# Altium PCB PCB1.PcbDoc
Units mm, origin at the board's own origin, x right, y up, seen from the top; angles counter-clockwise.
Board outline 56.39 x 66.29 mm, 2 copper layers (Top Layer, Bottom Layer); 8 components, 6 nets, 50 pads, 0 vias.
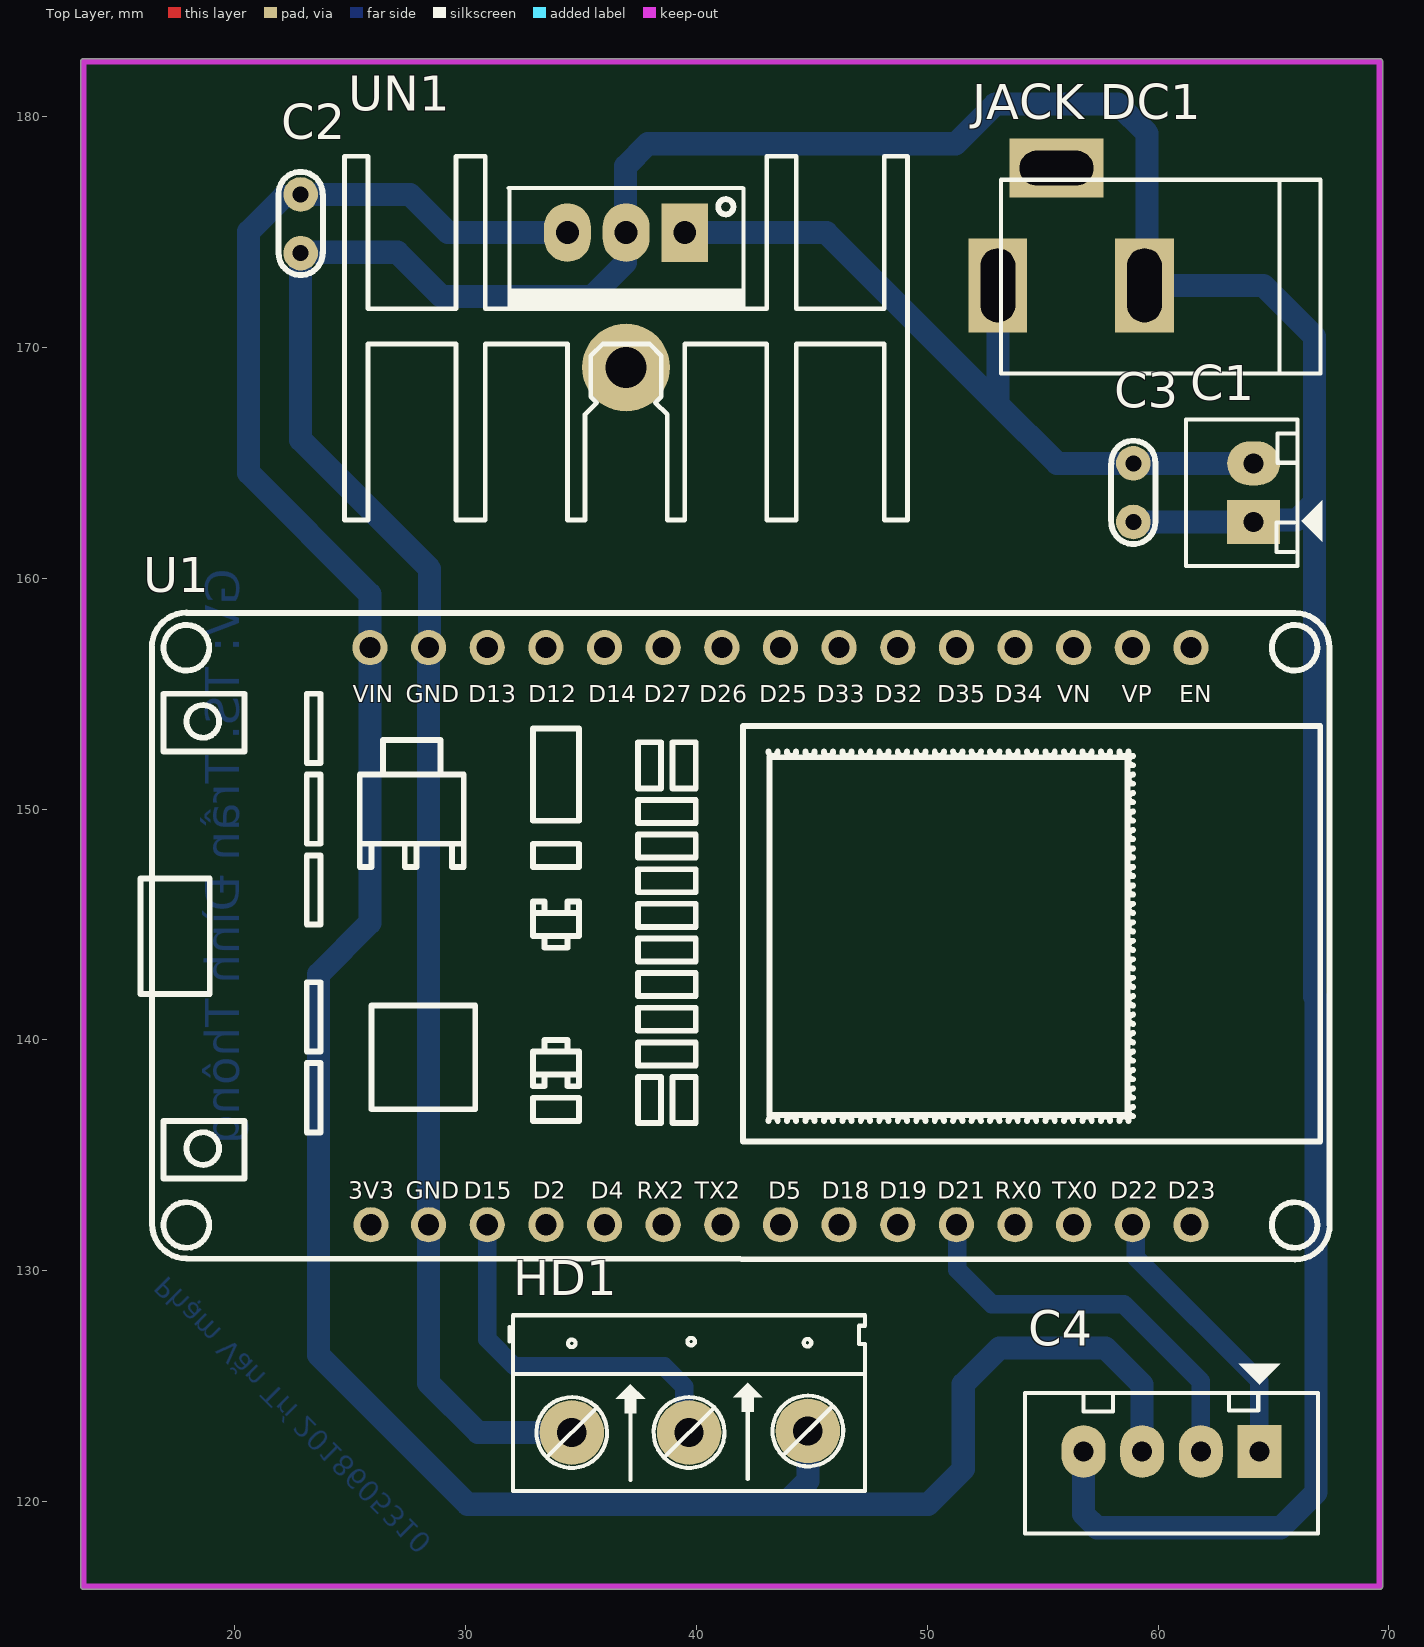
[diagram p0: Top Layer view]
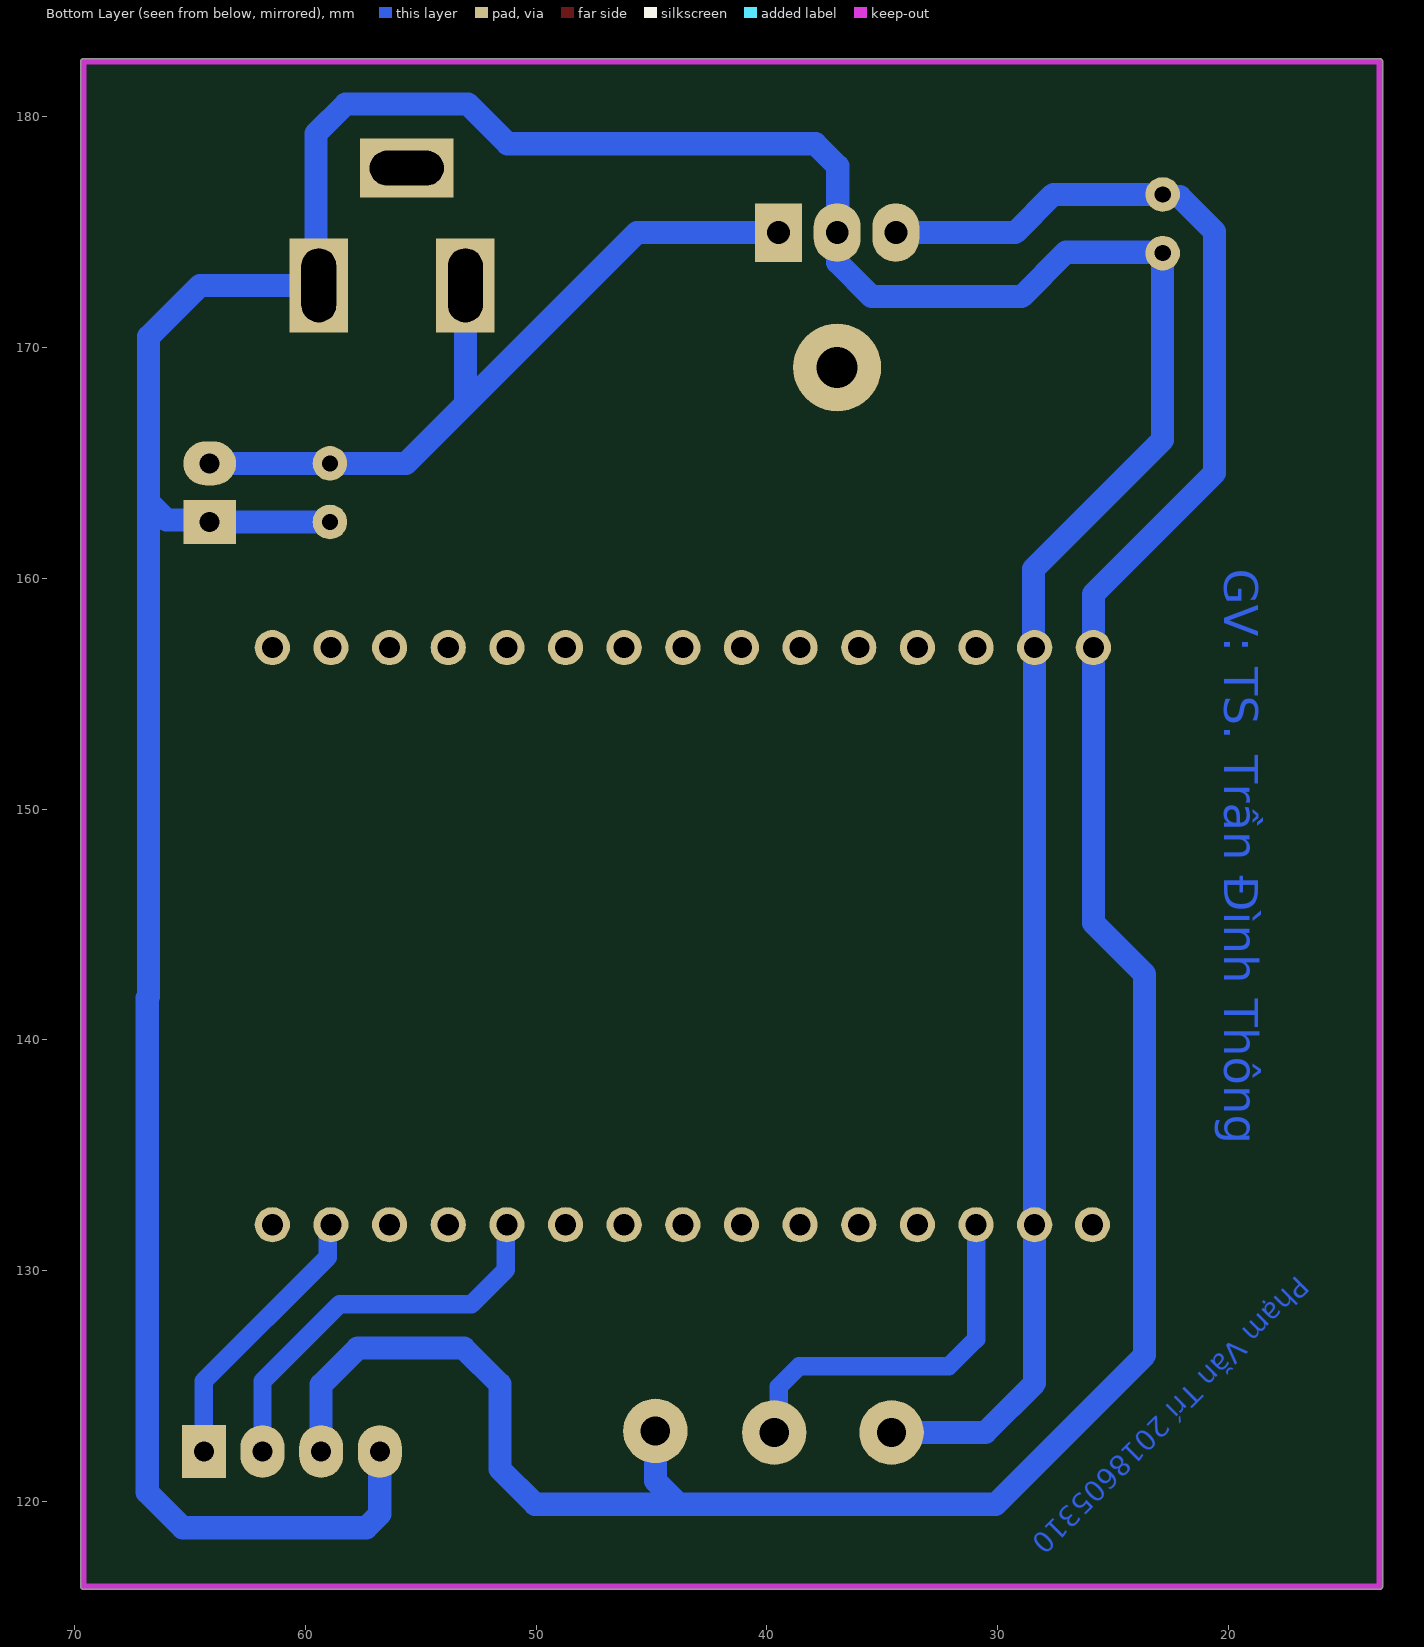
[diagram p1: Bottom Layer view, seen from below]
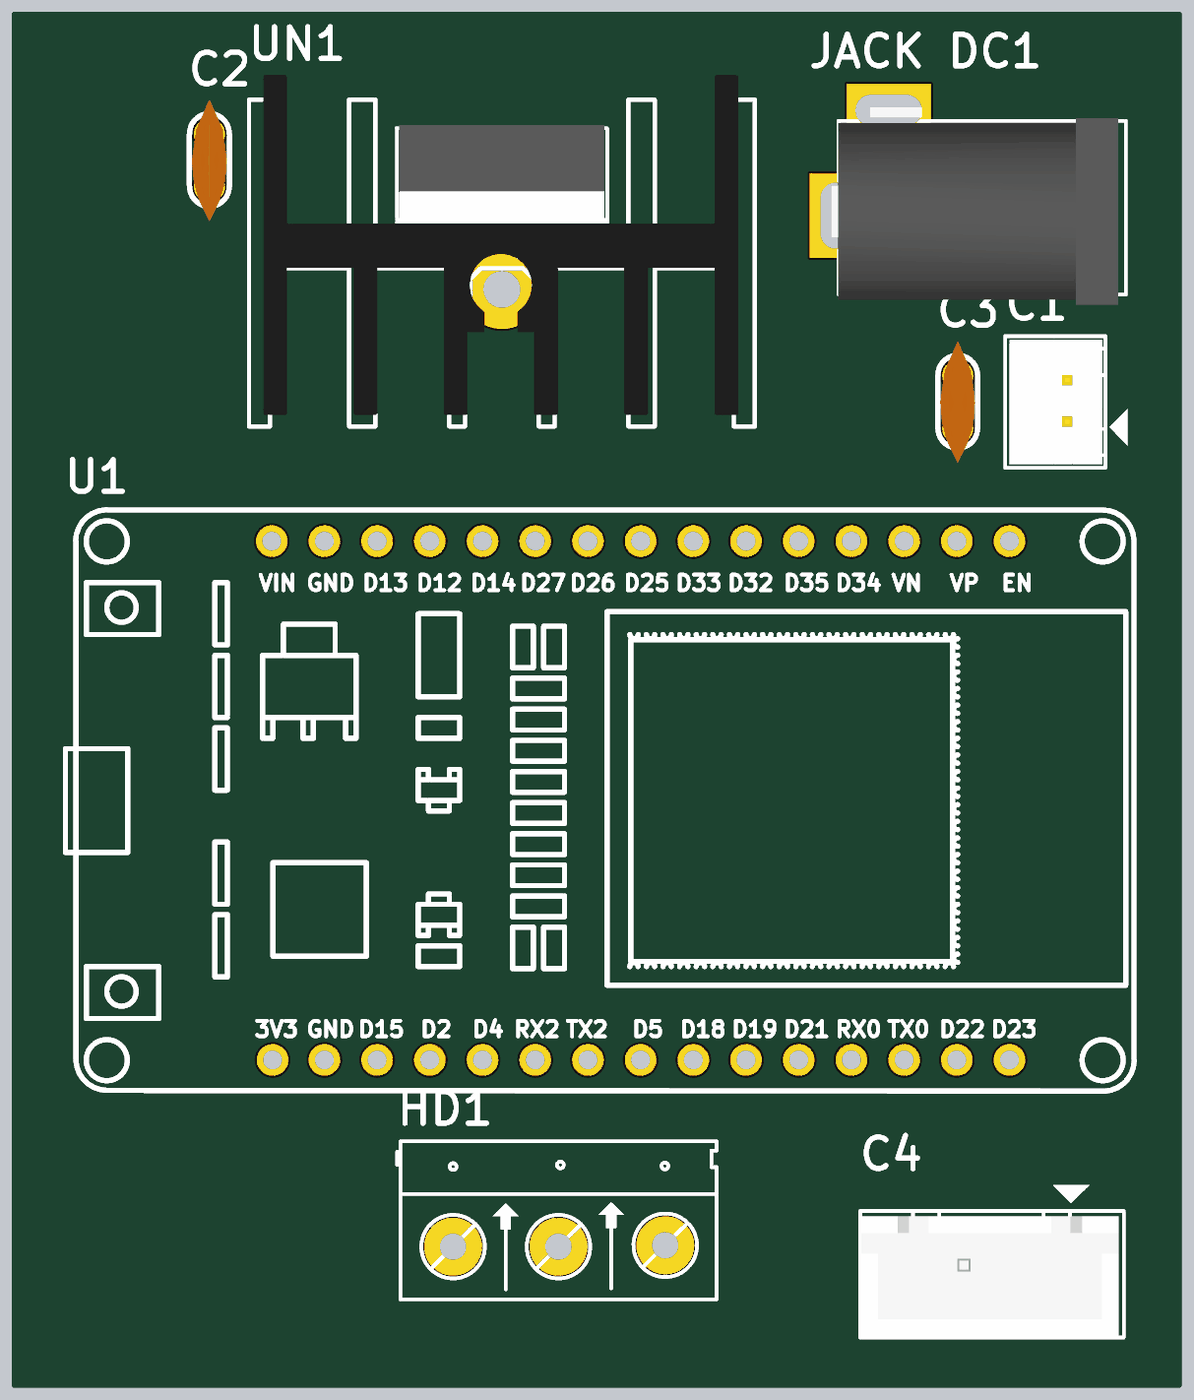
[diagram p2: 3D render of the assembled board from above, using the file's embedded part models]

## Layer stack, top to bottom
Top Solder: solder mask 0.0102, Solder Resist, Dk 3.5
Top Layer: signal copper 0.0356
Dielectric 1: dielectric 0.32, FR-4, Dk 4.8
Bottom Layer: signal copper 0.0356
Bottom Solder: solder mask 0.0102, Solder Resist, Dk 3.5

## Board outline
13.462,116.205 cw(c13.462,116.332) 13.335,116.332 13.335,182.372 cw(c13.462,182.372) 13.462,182.5 69.596,182.5 cw(c69.596,182.372) 69.724,182.372 69.724,116.332 cw(c69.596,116.332) 69.596,116.205

## Design rules (kind name [scope] priority, off if disabled: settings)
Clearance [All] p1: gap=1 ignorepadtopadclearanceinfootprint=FALSE
PolygonConnect [All] p1: connectstyle=Relief reliefconductorwidth=0.254 reliefentries=4 polygonreliefangle="90 Angle" airgapwidth=0.254
RoutingVias [All] p1: holewidth=0.711 width=1.27 viastyle="Through Hole" minholewidth=0.711 minwidth=1.27 maxholewidth=0.711 maxwidth=1.27
SolderMaskExpansion [All] p1: expansion=0.102 istentingtop=FALSE
Width VCC5 [InNet('VCC5')] p1: maxlimit=1 minlimit=1 preferedwidth=1
Width VCC_IN [InNet('VCC_IN')] p2: maxlimit=1 minlimit=1 preferedwidth=1
Width VCC33 [InNet('VCC5')] p3: maxlimit=1 minlimit=1 preferedwidth=1
Width GND [InNet('GND')] p4: maxlimit=1 minlimit=1 preferedwidth=1
Width [All] p5: maxlimit=0.8 minlimit=0.8 preferedwidth=0.8
30 further rules are at their usual default settings.

## Components (designator, comment, footprint, x,y, rotation, side; value= is the part's Value field where it differs from the comment)
C1 "Header2" Header2 64.135,162.432 r90 top
C2 "104" "tu gom" 22.86,175.349 r270 top
C3 "104" "tu gom" 58.928,163.703 r270 top
C4 "LCD_I2C" Header4 64.389,122.174 r180 top
HD1 "Header 3" HED3 34.605,122.997 r0 top
"JACK DC1" "JACK DC 5.5" "JACK DC 5.5" 56.236,175.222 r180 top value="Jac DC"
U1 "ESP32_MODULE copy" ESP32-WIFIMODULE-FOOTPRINT 41.91,142.367 r270 top
UN1 "L78M05CP" QTO-220H2 36.957,174.968 r180 top

## Footprints (in the part's own frame and the unit in brackets; to place one, negate y for a bottom-side part, rotate by r counter-clockwise, add the part's x,y. Pads: shape width x height; smd on the part's side, far side on the other; paste and mask are expansions set on the pad)
ESP32-WIFIMODULE-FOOTPRINT [mil]
  round 60 hole 36: 1(-575.9,768.25) 2(-575.9,668.25) 3(-575.9,568.25) 4(-575.9,468.25) 5(-575.9,368.25) 6(-575.9,268.25) 7(-575.9,168.25) 8(-575.9,68.25) 9(-575.9,-31.75) 10(-575.9,-131.75) 11(-575.9,-231.75) 12(-575.9,-331.75) 13(-575.9,-431.75) 14(-575.9,-531.75) 15(-575.9,-631.75) 16(408.35,-630.18) 17(408.35,-531.75) 18(408.35,-431.75) 19(408.35,-331.75) 20(408.35,-231.75) 21(408.35,-131.75) 22(408.35,-31.75) 23(408.35,68.25) 24(408.35,168.25) 25(408.35,268.25) 26(408.35,368.25) 27(408.35,468.25) 28(408.35,568.25) 29(408.35,668.25) 30(408.35,768.25)
  silkscreen extent -635,-1023 468,1005
Header2 [mil] "CON2"
  rect 75x90 hole 34: 1(0,0)
  oval 75x90 hole 34: 2(100,0)
  silkscreen extent -75,-118 175,115, body extent -68,-70 168,107, height 236
Header4 [mil] "CON4"
  rect 75x90 hole 34: 1(0,0)
  oval 75x90 hole 34: 2(100,0) 3(200,0) 4(300,0)
  silkscreen extent -100,-150 400,140, body extent -90,-90 398,136, height 276
HED3 [mil] "Header 3, 3 pin, hight 300mil, Pin to Pin 200, Colour Green"
  round 110 hole 50: 1(0,0) 2(200,0) 3(402.62,2.62)
  silkscreen extent -106,-100 500,200
"JACK DC 5.5" [mm] "Jac DC input"
  rect 2.54x4.064 hole 1.5 slot 3.2 at 90 deg: 1(3.175,2.54) 2(-3.175,2.54)
  rect 4.064x2.54 hole 1.5 slot 3.2 at 0 deg: 3(0.635,-2.54)
  silkscreen extent -10.8,-2.03 3.05,6.35, body extent -10.42,-2.67 3.4,6.84, height 11.02
QTO-220H2 [mil] "TO-220 - 1-2-3"
  round 150 hole 70: 0(0,230)
  rect 80x100 hole 39: 1(-100,0)
  oval 80x100 hole 39: 2(0,0) 3(100,0)
  silkscreen extent -480,-130 480,490, body extent -449,-177 453,469, height 1206
"tu gom" [mm] "Tu gom mini"
  round 1.5 hole 0.7: 1(-1.27,0) 2(1.27,0)
  silkscreen extent -2.25,-0.97 2.22,0.97, body extent -2.92,-0.85 2.92,0.85, height 6.12

## Part data
C1: "Header IDC, 2 x 1 Pin Vertical 2.54mm Pitch (Non-Boxed, Male)", Manufacturer="W¨¹rth Elektronik eiSos GmbH", partNo=613002143121, ComponentLink1 Description=Manufacturer, ComponentLink1URL=http://www.we-online.com, ComponentLink2 Description=Datasheet, ComponentLink2URL=http://katalog.we-online.de/em/datasheet/6130xx143121.pdf, Created by="Karrer Zheng", Created Date="29 March 2013", NoPins=02
C2 C3: library part "Tu gom 104 50V", "Cắm", Chung_Loai=Cắm, Don_Vi=Con, Ma_Hang=MH004761, So_Chan=2, Ten_Linh_Kien="Tụ gốm 104 100nF 50V"
C4: library part Header4, "Header IDC, 4 x 1 Pin Vertical 2.54mm Pitch (Non-Boxed, Male)", Manufacturer="W¨¹rth Elektronik eiSos GmbH", partNo=613002143121, ComponentLink1 Description=Manufacturer, ComponentLink1URL=http://www.we-online.com, ComponentLink2 Description=Datasheet, ComponentLink2URL=http://katalog.we-online.de/em/datasheet/6130xx143121.pdf, Created by="Karrer Zheng", Created Date="29 March 2013", NoPins=02
HD1: library part Hed3, "Header 3 (Green)"
UN1: "Positive Voltage Regulator", ComponentLink1Description="Manufacturer Link", ComponentLink1URL=http://www.st.com/, ComponentLink2Description=Datasheet, ComponentLink2URL=http://www.st.com/stonline/products/literature/ds/2146/l78m05c.pdf, DatasheetVersion=Apr-1994, LatestRevisionDate=17-Jul-2002, LatestRevisionNote="Re-released for DXP Platform.", Note="Tab is connected to pin 3 (GND).", PackageDescription="TO, Thru-Hole, Vertical, Heatsink Mounted; 3 In-Line Leads; Pitch 2.54 mm; Pin sequence 1, 3, 2", PackageReference=ISOWATT220AB, PackageVersion=Jul-1998, Published=24-Aug-2001, Publisher="Altium Limited"

## Nets (pads, with @x,y where several pads share a name; then routed paths per layer and width w, separated by ;. In a path a pad name is that pad's centre, name@x,y a point inside that pad or via, vN(x,y) a via of type N, cw(c..) or ccw(c..) an arc to the next point about the centre after c; other vN are vias at no path point)
DATA_SS: HD1.2 U1.18 | length 16.4
  Bottom Layer w0.8: U1.18 30.944,127.044 32.131,125.857 38.608,125.857 39.48,124.985 39.48,123.202 HD1.2
GND: "JACK DC1.2" C1.1 C2.2 C3.2 C4.4 HD1.1 U1.14 U1.17 UN1.2 | length 189.1
  Bottom Layer w1: HD1.1 30.547,122.997 28.404,125.14 U1.17 U1.14 28.448,157.04 28.448,160.401 22.86,165.989 C2.2 22.898,174.117 27.051,174.117 28.97,172.198 35.46,172.198 36.933,173.672 36.933,174.944 UN1.2 36.933,174.992 36.933,177.85 37.9,178.816 51.232,178.816 52.948,180.532 58.254,180.532 59.523,179.263 59.523,172.794 59.411,172.682 64.554,172.682 66.778,170.458 66.778,163.298 ; C4.4 56.769,119.458 57.355,118.872 65.304,118.872 66.842,120.41 66.842,141.822 66.778,141.886 66.778,163.298 ; C3.2 C1.1@64.135,162.433 ; C1.1 64.223,162.519 65.999,162.519 66.778,163.298
SCL: C4.1 U1.29 | length 12.1
  Bottom Layer w0.8: U1.29 59.022,131.857 59.022,130.589 64.389,125.222 C4.1
SDA: C4.2 U1.26 | length 17.6
  Bottom Layer w0.8: U1.26 51.308,131.951 51.308,130.048 52.801,128.556 58.51,128.556 61.849,125.217 C4.2
VCC5: C2.1 C4.3 HD1.3 U1.15 UN1.3 | length 117.4
  Bottom Layer w1: UN1.3 29.248,174.968 27.597,176.619 C2.1 22.765,176.524 22.123,176.524 20.61,175.011 20.61,164.556 25.864,159.303 U1.15 25.864,145.067 23.642,142.845 23.642,126.346 30.099,119.888 43.815,119.888 ; HD1.3 44.831,120.904 43.815,119.888 ; C4.3 59.309,125.07 57.723,126.656 53.123,126.656 51.562,125.095 51.562,121.412 50.038,119.888 43.815,119.888
VCC_IN: "JACK DC1.1" C1.2 C3.1 UN1.1 | length 33.9
  Bottom Layer w1: UN1.1 45.631,174.968 53.061,167.539 ; 53.061,172.682 53.061,167.539 ; C3.1 55.626,164.973 53.061,167.539 ; C3.1 C1.2@64.135,164.973
pads on no net: "JACK DC1.3" U1.1 U1.2 U1.3 U1.4 U1.5 U1.6 U1.7 U1.8 U1.9 U1.10 U1.11 U1.12 U1.13 U1.16 U1.19 U1.20 U1.21 U1.22 U1.23 U1.24 U1.25 U1.27 U1.28 U1.30 UN1.0

## Keep-outs
Keep-Out Layer:
  lines w0.254: 13.462,116.332 13.462,182.372 14.351,182.372 69.596,182.372 69.596,117.856 69.596,116.332 13.462,116.332

## Other copper
Bottom Layer:
  text "GV: TS. Trần Đình Thông" at 20.701,160.401 h2.52 r90
  text "Phạm Văn Trí 2018605310" at 17.272,130.048 h1.52 r135

## Text inside footprints (layer, text, board x,y; h text height)
U1: Top Overlay "VIN" at 25.124,154.62 h0.75; Top Overlay "GND" at 27.424,154.62 h0.75; Top Overlay "D13" at 30.124,154.62 h0.75; Top Overlay "D12" at 32.724,154.62 h0.75; Top Overlay "D14" at 35.324,154.62 h0.75; Top Overlay "D27" at 37.724,154.62 h0.75; Top Overlay "D26" at 40.124,154.62 h0.75; Top Overlay "D25" at 42.724,154.62 h0.75; Top Overlay "D33" at 45.224,154.62 h0.75; Top Overlay "D32" at 47.724,154.62 h0.75; Top Overlay "D35" at 50.424,154.62 h0.75; Top Overlay "D34" at 52.924,154.62 h0.75; Top Overlay "VN" at 55.624,154.62 h0.75; Top Overlay "VP" at 58.424,154.62 h0.75; Top Overlay "EN" at 60.924,154.62 h0.75; Top Overlay "3V3" at 24.924,133.12 h0.75; Top Overlay "GND" at 27.424,133.12 h0.75; Top Overlay "D15" at 29.924,133.12 h0.75; Top Overlay "D2" at 32.924,133.12 h0.75; Top Overlay "D4" at 35.424,133.12 h0.75; Top Overlay "RX2" at 37.424,133.12 h0.75; Top Overlay "TX2" at 39.924,133.12 h0.75; Top Overlay "D5" at 43.124,133.12 h0.75; Top Overlay "D18" at 45.424,133.12 h0.75; Top Overlay "D19" at 47.924,133.12 h0.75; Top Overlay "D21" at 50.424,133.12 h0.75; Top Overlay "RX0" at 52.924,133.12 h0.75; Top Overlay "TX0" at 55.424,133.12 h0.75; Top Overlay "D22" at 57.924,133.12 h0.75; Top Overlay "D23" at 60.424,133.12 h0.75